# EAGLE board eeZeeSwitch (EAGLE 6.4)
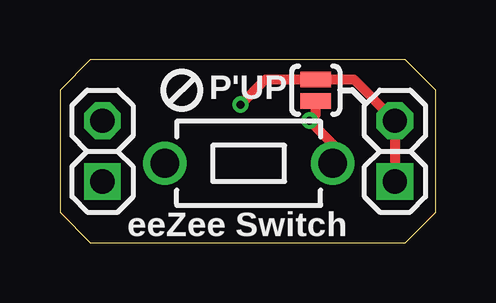
[diagram p0: board, top side]
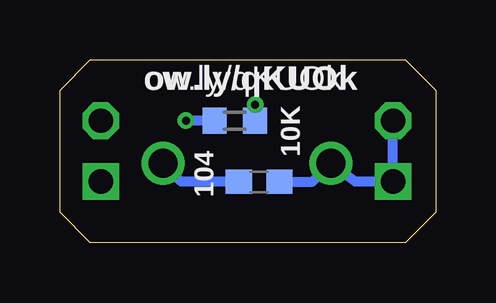
[diagram p1: board, bottom side, seen from below]

Size 15.67 x 7.61 mm. Coordinates in mm from the lower left corner, seen from the top.
Outline: 0,6.34 0,1.27 1.27,0 14.4,0 15.67,1.27 15.67,6.34 14.4,7.61 1.27,7.61 0,6.34
Copper layers (1*16): Top 0.0356mm / dielectric 1.5011mm / Bottom 0.0356mm
Design rules "LaenPCBOrder *": minimum track width 6mil, minimum drill 13mil, track to track 6mil, track to pad 6mil, pad to pad 6mil, via to via 6mil, smd to smd 6mil, copper to edge 10mil, drill to drill 6mil, minimum pad ring 7mil, minimum via ring 7mil, stop-mask expansion 4mil, vias tented up to drill 20mil, thermal gap 10mil

## Footprints (pad centres in the part's own frame; a part is rotated, then mirrored left to right if it is on the bottom)
C0603 = smd 1.1 x 1: 1 -0.85,0; 2 0.85,0
1X02-S = drill 1.016 square: 1 -1.27,0 | drill 1.016 octagon: 2 1.27,0
R0603 = smd 1 x 1.1: 1 -0.85,0; 2 0.85,0
6MMTACTILE_RECT = drill 1.2: P$1 -3.5,0; P$2 3.5,0
SJ_2S-NO = smd 0.635 x 1.27: 1 -0.45,0; 2 0.45,0

## Placement (x,y rotation side)
C1  104  [C0603]  7.37,2.54 180 bottom
JP1  [1X02-S]  13.97,3.81 90 top
JP2  [1X02-S]  1.78,3.81 90 top
R1  10K  [R0603]  8.38,5.08 0 bottom
S1  eeZee Switch  [6MMTACTILE_RECT]  7.87,3.3 0 top
SJ1  P'UP  [SJ_2S-NO]  10.67,6.35 90 top

## Library data of the parts
C1 R1 = rcl
JP1 JP2 = pinhead-2
S1 = bt_electromech
SJ1 = SparkFun

## Nets
N$1: C1.2 R1.1 S1.P$2 SJ1.1
N$2: C1.1 JP2.1 JP2.2 S1.P$1
N$3: JP1.1 JP1.2 R1.2 SJ1.2

## Tracks (layer width: path | path; a pad name or v marks a point on that pad's centre or on a via)
N$1  (via drill 0.33)
  Top 0.406: SJ1.1 10.67,5.33 v10.41,5.08 11.37,4.12 S1.P$2
  Bottom 0.406: C1.2 10.61,2.54 S1.P$2 | R1.1 v10.41,5.08
N$2
  Bottom 0.406: JP2.2 JP2.1 3.36,2.54 S1.P$1 5.14,2.54 C1.1
N$3  (via drill 0.33)
  Top 0.406: v7.53,5.75 8.58,6.8 SJ1.2 12.25,6.8 JP1.2 JP1.1
  Bottom 0.406: R1.2 v7.53,5.75

## Text on the board
bPlace: ow.ly/qKUOk
tsilk: P'UP | eeZee Switch
bsilk: 10K | ow.ly/qKUOk | 104